# Altium PCB spectroscopy_pcb_v2.PcbDoc
Units mm, origin at the board's own origin, x right, y up, seen from the top; angles counter-clockwise.
Board outline 50 x 30 mm, 4 copper layers (Top Layer, Mid Layer 1, Mid Layer 2, Bottom Layer), stack 1.57 mm thick; 52 components, 39 nets, 192 pads, 52 vias.
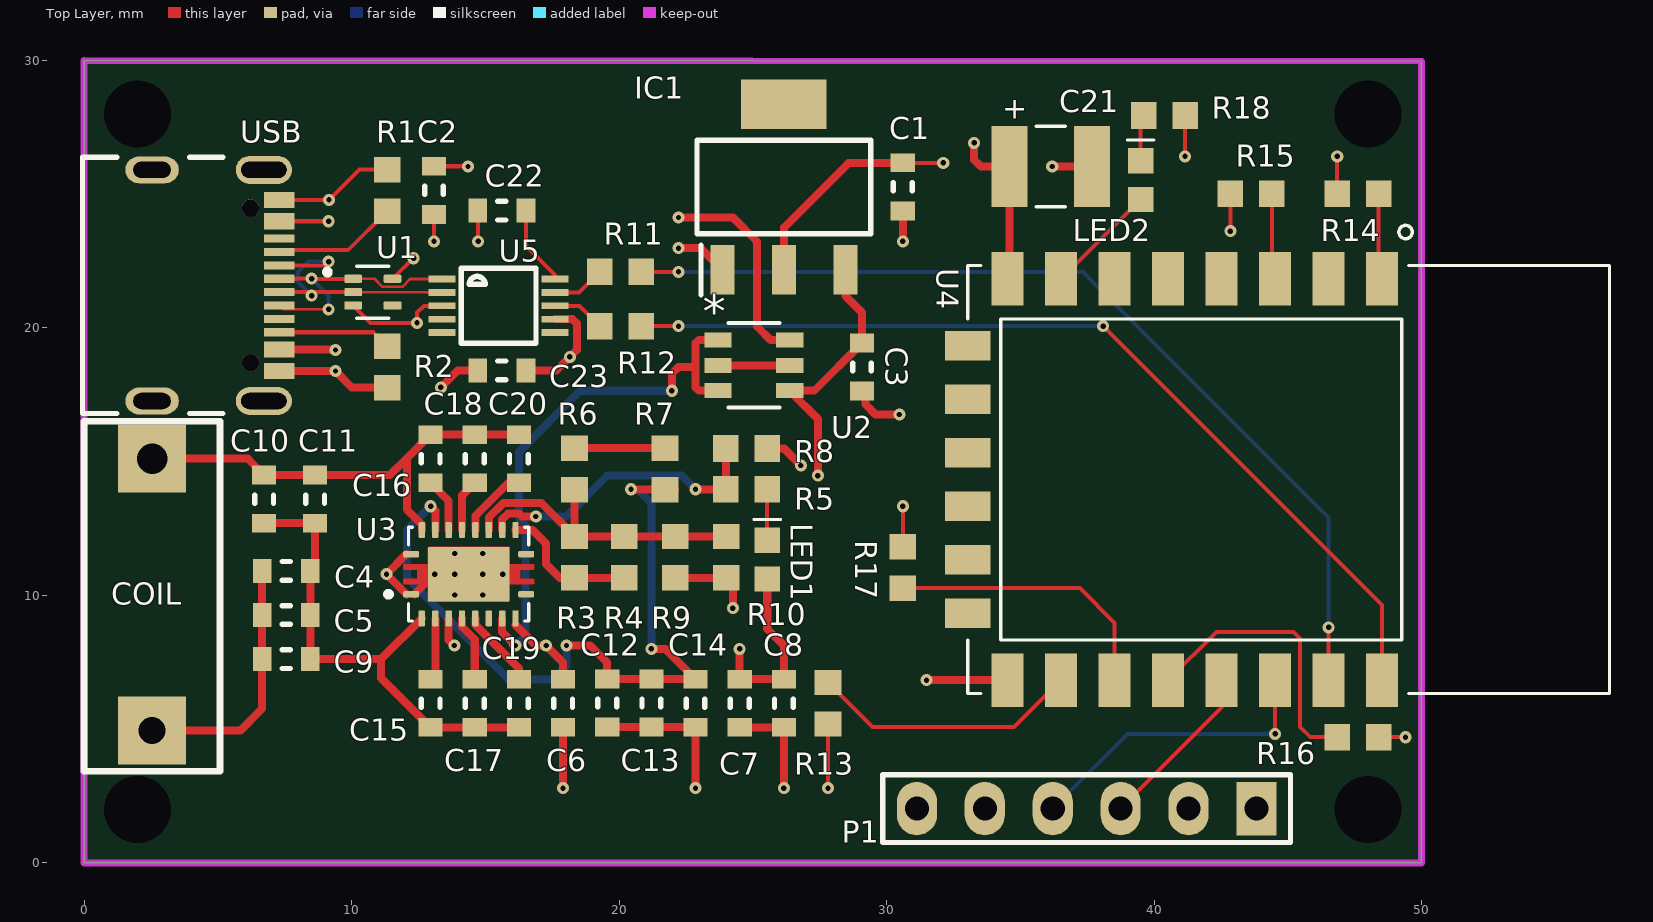
[diagram p0: Top Layer view]
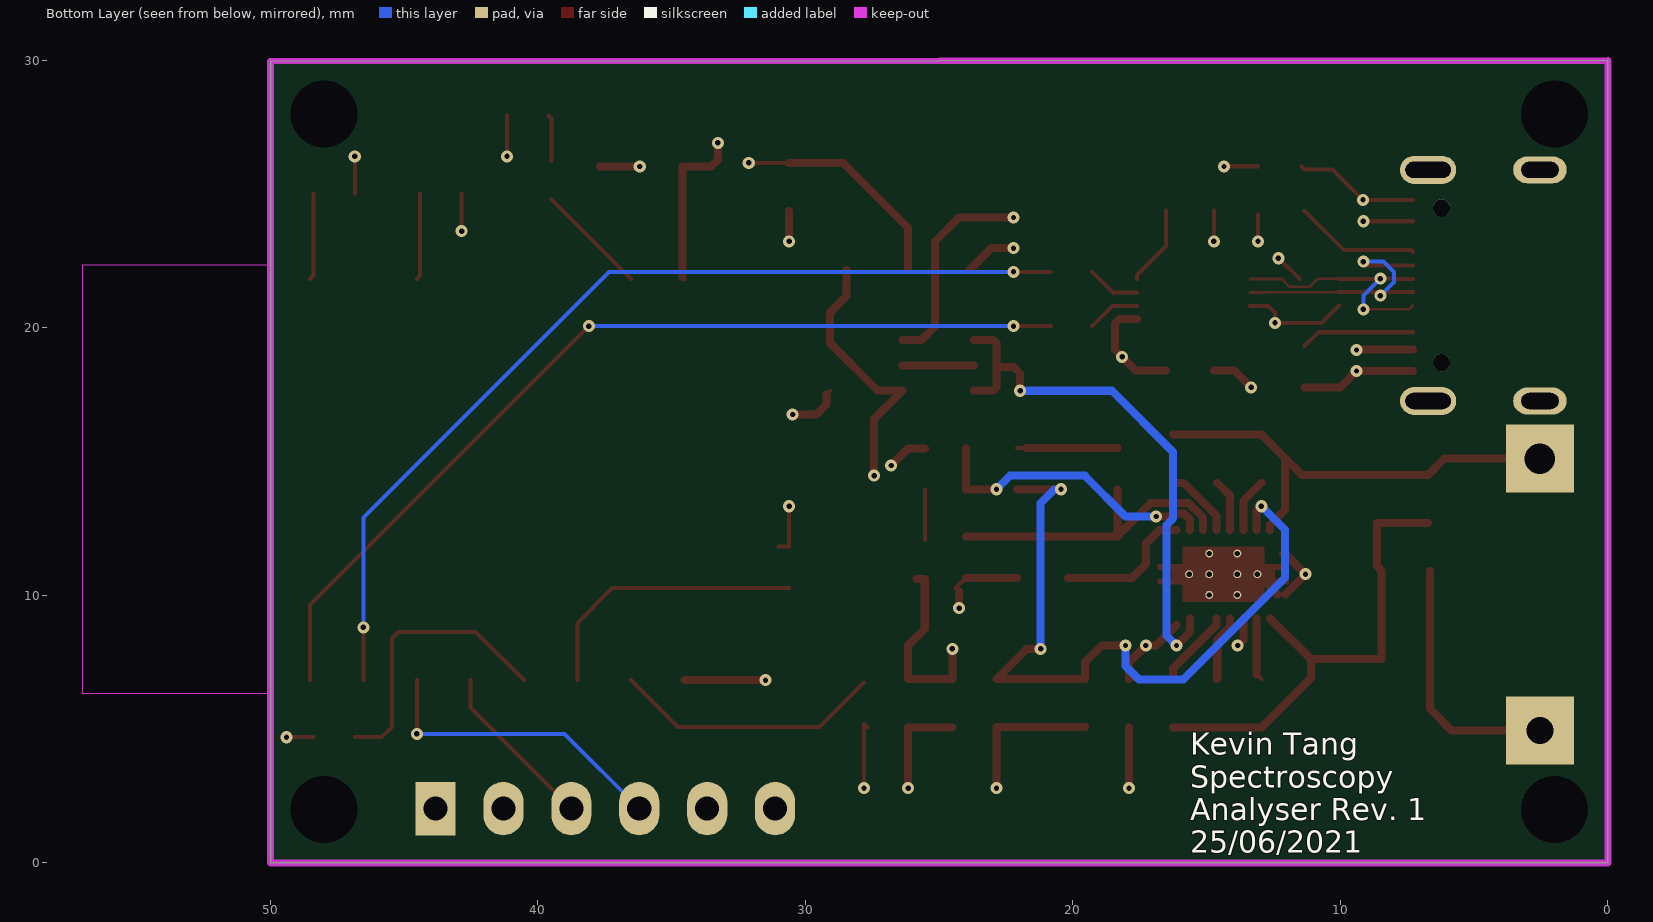
[diagram p1: Bottom Layer view, seen from below]
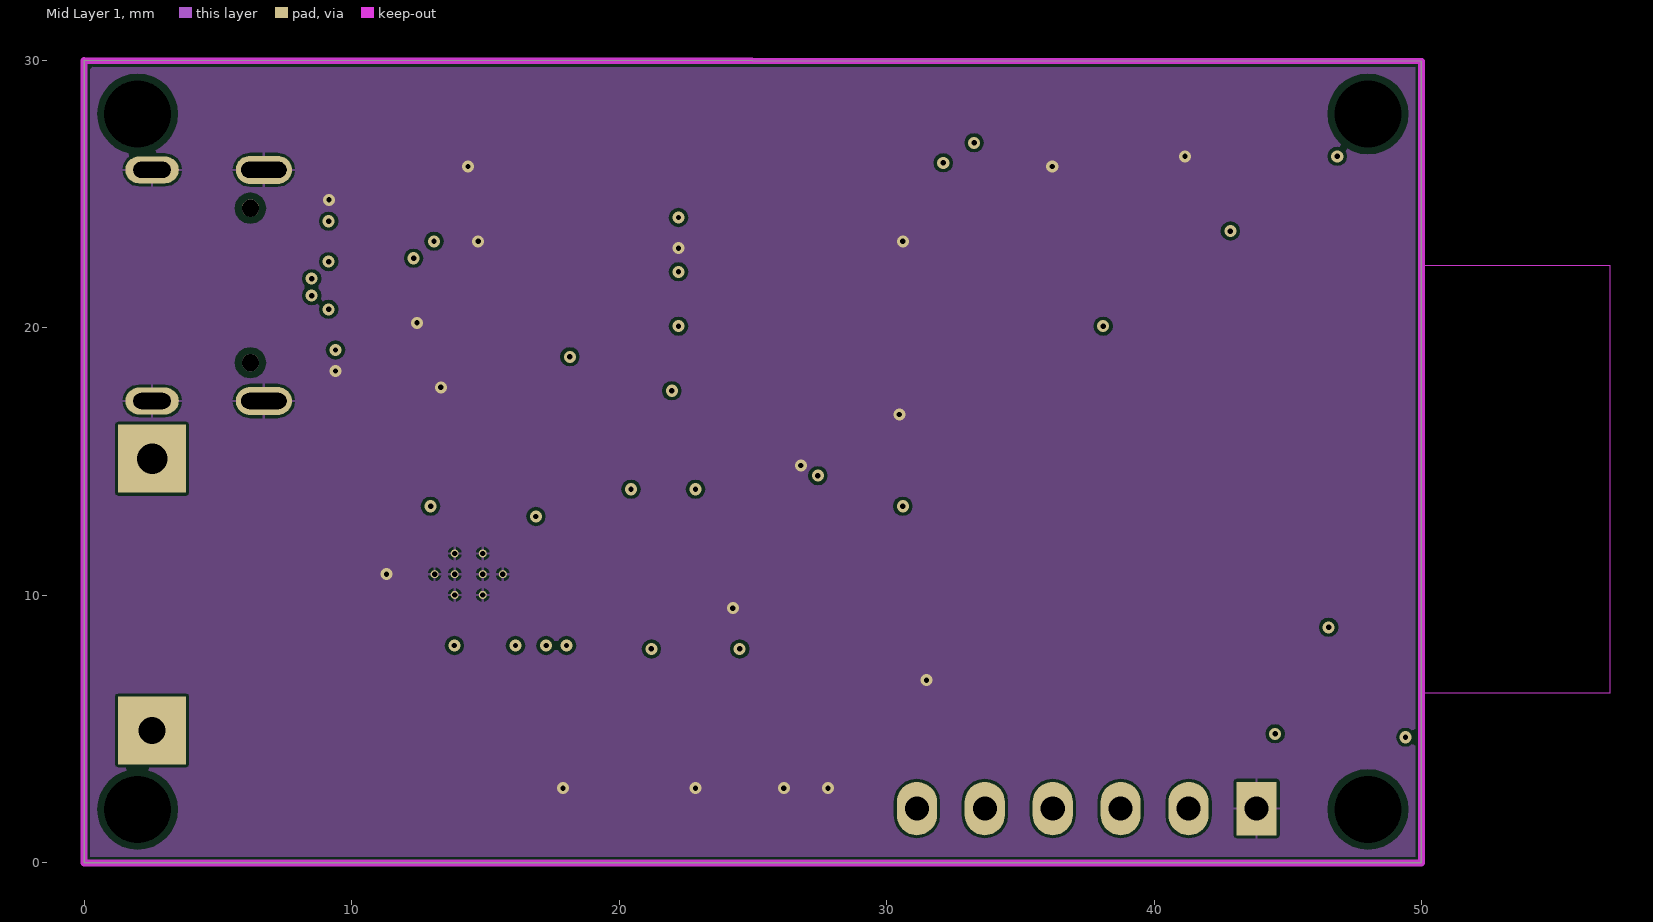
[diagram p2: Mid Layer 1]
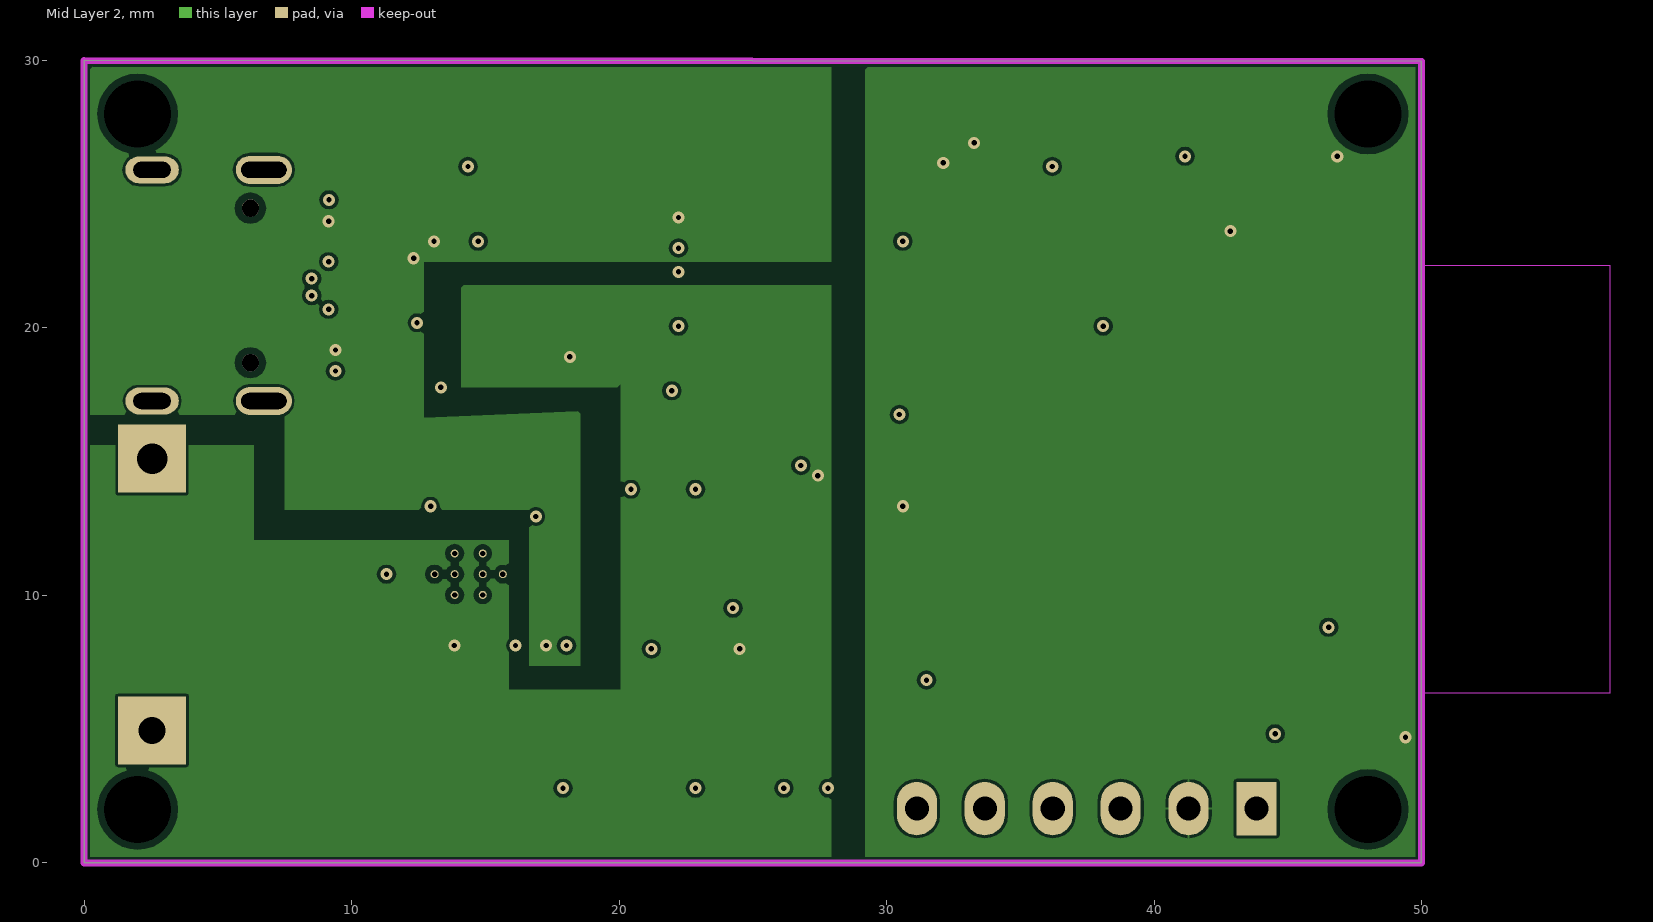
[diagram p3: Mid Layer 2]
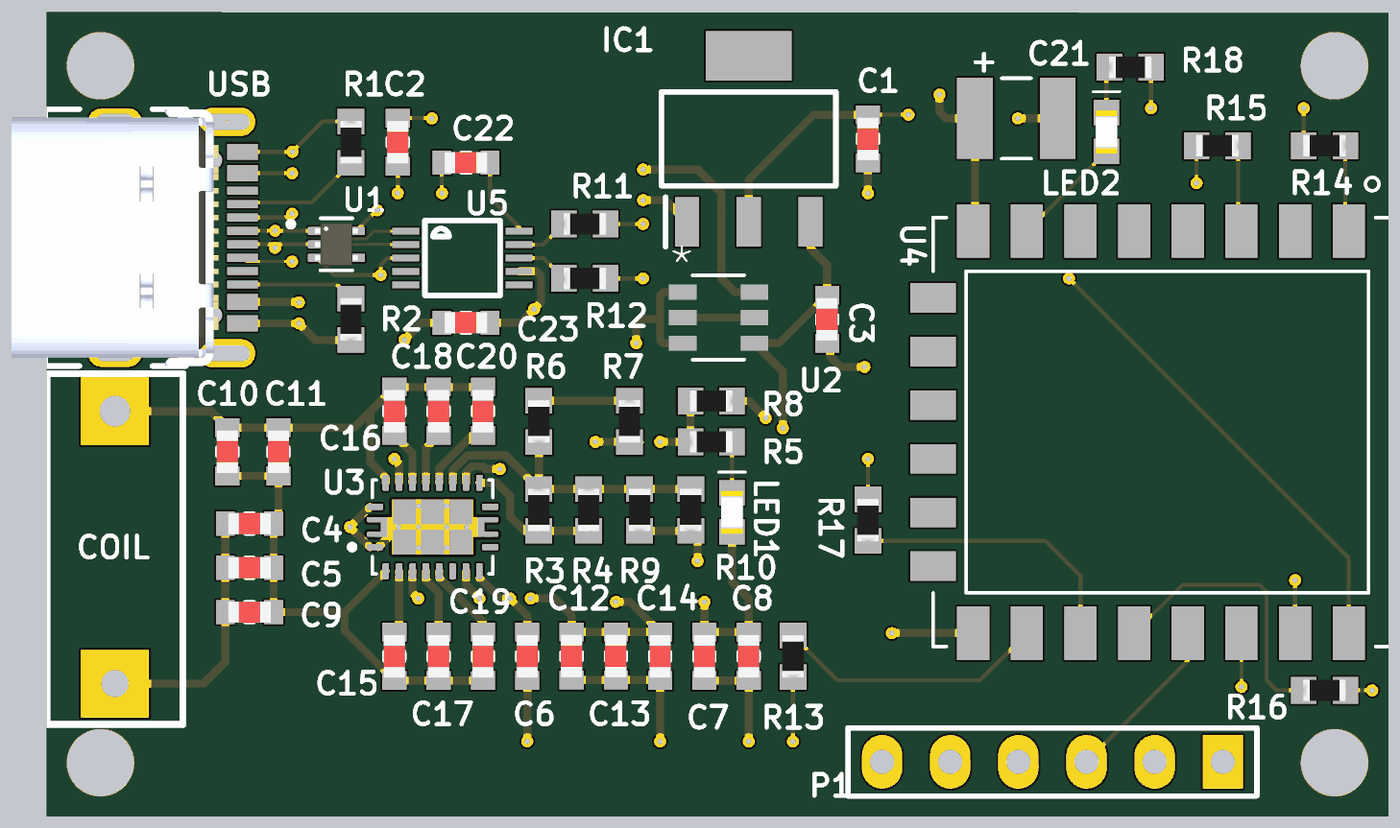
[diagram p4: 3D render of the assembled board from above, using the file's embedded part models]

## Layer stack, top to bottom
Top Solder: solder mask 0.0127, Solder Resist, Dk 3.8
Top Layer: signal copper 0.035
Dielectric 1: prepreg 0.1, 2313, Dk 4.05
Mid Layer 1: signal copper 0.0175
Core: core 1.265, FR-4, Dk 4.5
Mid Layer 2: signal copper 0.0175
Dielectric 2: prepreg 0.1, 2313, Dk 4.05
Bottom Layer: signal copper 0.035
Bottom Solder: solder mask 0.0127, Solder Resist, Dk 3.8

## Board outline
0,0 0,30 50,29.972 50,0

## Design rules (kind name [scope] priority, off if disabled: settings)
BoardOutlineClearance [All] p1: gap=0.2 ignorepadtopadclearanceinfootprint=FALSE
Clearance [All] p1: gap=0.102 ignorepadtopadclearanceinfootprint=FALSE except(0.127: Arc-Via Track-Via SMDPad-Via THPad-Via Via-Via Via-Fill Via-Poly Via-Region Via-Text; 0.25: Arc-Hole Track-Hole SMDPad-Hole THPad-Hole Via-Hole Fill-Hole Poly-Hole Region-Hole Text-Hole)
ComponentClearance [All] p1: gap=0.102 collisioncheckmode=3 verticalgap=0.102 showdistances=TRUE
DiffPairsRouting [All] p1: maxlimit=0.102 minlimit=0.102 mostfreqgap=0.102 toplayer_minwidth=0.102 toplayer_maxwidth=1816.048 toplayer_prefwidth=0.102 midlayer1_minwidth=0.102 midlayer1_maxwidth=1816.048 midlayer1_prefwidth=0.102 midlayer2_minwidth=0.102 midlayer2_maxwidth=1816.048 midlayer2_prefwidth=0.102 bottomlayer_minwidth=0.102 bottomlayer_maxwidth=1816.048 bottomlayer_prefwidth=0.102 maxuncoupledlength=12.7
Height [All] p1: minheight=0 maxheight=1816.048 prefheight=12.7
HoleSize [All] p1: absolutevalues=TRUE maxlimit=6.3 minlimit=0.2 maxpercent=80.000 minpercent=20.000
HoleToHoleClearance [All] p1: gap=0.25 allowstackedmicrovias=FALSE
MinimumAnnularRing [All] p1: minimumring=0.076
MinimumSolderMaskSliver [All] p1: minsoldermaskwidth=0
PlaneClearance [All] p1: clearance=0.102
PlaneConnect PlaneConnectPowerPads [InPadClass('PowerPads')] p1: planeconnectstyle=Direct reliefexpansion=0.508 reliefentries=4 reliefconductorwidth=0.254 reliefairgap=0.254
PlaneConnect [All] p2: pad.planeconnectstyle=Relief pad.reliefexpansion=0.3 pad.reliefentries=4 pad.reliefconductorwidth=0.102 pad.reliefairgap=0.102 via.planeconnectstyle=Direct via.reliefexpansion=0.3 via.reliefentries=4 via.reliefconductorwidth=0.127 via.reliefairgap=0.127
PolygonConnect PolygonConnectPowerPads [All vs (InPadClass('PowerPads'))] p1: connectstyle=Direct reliefconductorwidth=0.254 reliefentries=4 polygonreliefangle="90 Angle" airgapwidth=0.254
PolygonConnect [All] p2: thpad.connectstyle=Relief thpad.reliefconductorwidth=0.102 thpad.reliefentries=4 thpad.polygonreliefangle="90 Angle" thpad.airgapwidth=0.102 smdpad.connectstyle=Relief smdpad.reliefconductorwidth=0.102 smdpad.reliefentries=4 smdpad.polygonreliefangle="90 Angle" smdpad.airgapwidth=0.102 via.connectstyle=Direct via.reliefconductorwidth=0.127 via.reliefentries=4 via.polygonreliefangle="90 Angle" via.airgapwidth=0.127
RoutingVias [All] p1: holewidth=0.2 width=0.45 viastyle="Through Hole" minholewidth=0.2 minwidth=0.45 maxholewidth=6.3 maxwidth=6.55
SilkToSilkClearance [All] p1: silktosilkclearance=0
SilkToSolderMaskClearance [IsPad] p1: minsilkscreentomaskgap=0.102 clearancetoexposedcopper=TRUE
SolderMaskExpansion [All] p1: expansion=0.075
Width [All] p1: maxlimit=1816.048 minlimit=0.102 preferedwidth=0.102
20 further rules are at their usual default settings.

## Classes and differential pairs
differential pair D: +D_P -D_N

## Components (designator, comment, footprint, x,y, rotation, side; value= is the part's Value field where it differs from the comment)
C1 "22uF" CAP0603 30.607,25.273 r270 top
C2 "0.1uF" CAP0603 13.081,25.146 r90 top
C3 "10uF" CAP0603 29.083,18.542 r270 top
C4 "12 nF" CAP0603 7.556,10.922 r0 top
C5 "39 nF" CAP0603 7.556,9.271 r0 top
C6 "1uF" CAP0603 17.907,5.969 r270 top
C7 "10uF" CAP0603 24.511,5.969 r270 top
C8 "0.1uF" CAP0603 26.162,5.969 r270 top
C9 "82 nF" CAP0603 7.556,7.62 r0 top
C10 "1.8 nF" CAP0603 6.731,13.6 r90 top
C11 "100 pF" CAP0603 8.636,13.6 r90 top
C12 "10uF" CAP0603 19.558,5.98 r270 top
C13 "10uF" CAP0603 21.209,5.98 r270 top
C14 "0.1uF" CAP0603 22.86,5.969 r270 top
C15 "10nF" CAP0603 12.954,5.969 r90 top
C16 "10nF" CAP0603 12.954,15.113 r270 top
C17 "0.47uF" CAP0603 14.605,5.969 r90 top
C18 "0.47uF" CAP0603 14.605,15.113 r270 top
C19 "22nF" CAP0603 16.256,5.969 r90 top
C20 "22nF" CAP0603 16.256,15.113 r270 top
C21 "100uF TAJB107K006RNJ" CAPPC3528X210N 36.139,26.035 r0 top
C22 "10uF" CAP0603 15.621,24.384 r180 top
C23 "100nF" CAP0603 15.621,18.415 r180 top
COIL "WR483265-15F5-G" ece-INDUCTOR1005 2.54,15.113 r270 top
IC1 "AZ1117IH-3.3TRG1" SOT230P700X170-4N 26.162,25.273 r90 top
LED1 "QTLP601C4TR" LED0603P 25.54,11.34 r90 top
LED2 "QTLP601C4TR" LED0603P 39.497,25.527 r90 top
P1 "Header 6" ece-HDR1X6 43.834,2.032 r180 top
R1 "5.1k 5%" RES0603 11.335,25.146 r270 top
R2 "5.1k 5%" RES0603 11.335,18.542 r90 top
R3 "330" RES0603 18.338,11.43 r270 top
R4 "39k" RES0603 20.193,11.43 r270 top
R5 "1.5k" RES0603 24.765,13.97 r0 top
R6 "10k" RES0603 18.338,14.732 r90 top
R7 "10k" RES0603 21.717,14.732 r270 top
R8 "10k" RES0603 24.765,15.494 r180 top
R9 "220" RES0603 22.098,11.43 r90 top
R10 "1.8k" RES0603 24.003,11.43 r90 top
R11 "470" RES0603 20.053,22.098 r0 top
R12 "470" RES0603 20.053,20.066 r0 top
R13 "10k" RES0603 27.813,5.969 r90 top
R14 "10k" RES0603 47.625,25.019 r180 top
R15 "10k" RES0603 43.629,25.019 r180 top
R16 "10k" RES0603 47.625,4.699 r0 top
R17 "10k" RES0603 30.607,11.049 r90 top
R18 "470" RES0603 40.386,27.94 r0 top
U1 "TPD3E001DRLR" SOT50P160X60-5N 10.795,21.34 r0 top
U2 "Dual PMOS with Common Source for Reverse Current Blocking" TRANS_QS6_ROM 25.039,18.605 r0 top
U3 "BQ51013BRHLT" IC_MSP430FR2522IRHLR 14.379,10.794 r90 top
U4 "ESP8266-12E/ESP-12E" XCVR_ESP8266-12E/ESP-12E 41.529,14.336 r270 top
U5 "CH340E" MSOP10 15.494,20.828 r0 top
USB "USB4105-GF-A" GCT_USB4105-GF-A 2.54,21.59 r270 top

## Footprints (in the part's own frame and the unit in brackets; to place one, negate y for a bottom-side part, rotate by r counter-clockwise, add the part's x,y. Pads: shape width x height; smd on the part's side, far side on the other; paste and mask are expansions set on the pad)
CAP0603 [mm] "Chip Capacitor, 2-Leads, Body 1.6x0.8mm, IPC Medium Density"
  rect 0.7x0.9 smd: 1(-0.9,0) 2(0.9,0)
  silkscreen extent -0.15,-0.35 0.15,0.35, body extent -0.8,-0.4 0.8,0.4, height 0.3
CAPPC3528X210N [mm]
  rect 1.34x3.02 smd: 1(-1.54,0) 2(1.54,0)
  silkscreen extent -0.55,-1.5 0.55,1.5
ece-HDR1X6 [mm] "Header 6 way"
  rect 1.5x2 hole 0.9: 1(0,0)
  oval 1.5x2 hole 0.9: 2(2.54,0) 3(5.08,0) 4(7.62,0) 5(10.16,0) 6(12.7,0)
  silkscreen extent -1.27,-1.27 13.97,1.27
ece-INDUCTOR1005 [mil]
  rect 100x100 hole 45: 1(0,0)
  rect 100x100 hole 40: 2(400,0)
  silkscreen extent -55,-100 460,100
GCT_USB4105-GF-A [mm]
  rect 0.6x1.15 smd: A1_B12(-3.2,4.755) A4_B9(-2.4,4.755) B1_A12(3.2,4.755) B4_A9(2.4,4.755)
  rect 0.3x1.15 smd: A5(-1.25,4.755) A6(-0.25,4.755) A7(0.25,4.755) A8(1.25,4.755) B5(1.75,4.755) B6(0.75,4.755) B7(-0.75,4.755) B8(-1.75,4.755)
  oval 1.05x2.1 hole 0.6 slot 1.7 at 90 deg: S1(-4.32,4.18) S4(4.32,4.18)
  oval 1x2 hole 0.6 slot 1.4 at 90 deg: S2(-4.32,0) S3(4.32,0)
  round 0.65 hole 0.65 unplated: ""(-2.89,3.68) ""(2.89,3.68)
  silkscreen extent -4.79,-2.6 4.79,2.65, body extent -4.79,-3.86 4.79,3.86, height 3.31
IC_MSP430FR2522IRHLR [mm]
  rrect42% 0.24x0.6 smd: 1(-0.75,2.15) 10(-0.75,-2.15) 11(0.75,-2.15) 20(0.75,2.15)
  rrect42% 0.6x0.24 smd: 2(-1.65,1.75) 3(-1.65,1.25) 4(-1.65,0.75) 5(-1.65,0.25) 6(-1.65,-0.25) 7(-1.65,-0.75) 8(-1.65,-1.25) 9(-1.65,-1.75) 12(1.65,-1.75) 13(1.65,-1.25) 14(1.65,-0.75) 15(1.65,-0.25) 16(1.65,0.25) 17(1.65,0.75) 18(1.65,1.25) 19(1.65,1.75)
  rrect5% 2.05x3.05 smd paste-3: 21(0,0)
  round 0.3 hole 0.2: 22(0,1.275) 23(-0.775,0.525) 24(0,0.525) 25(0.775,0.525) 26(-0.775,-0.525) 27(0,-0.525) 28(0.775,-0.525) 29(0,-1.275)
  Top Layer region: 381 vertices and 0 holes, not listed, extent -1.025,-2.45 1.025,2.45
  silkscreen extent -1.75,-2.25 1.75,3.1
LED0603P [mm]
  rect 0.95x0.95 smd: 1(-0.725,0) 2(0.725,0)
  silkscreen extent 1.5,-0.5 1.5,0.5, body extent -0.8,-0.4 0.81,0.4, height 0.72
MSOP10 [mm]
  rect 1x0.25 smd: 1(-2.113,1) 2(-2.113,0.5) 3(-2.113,0) 4(-2.113,-0.5) 5(-2.113,-1) 6(2.113,-1) 7(2.113,-0.5) 8(2.113,0) 9(2.113,0.5) 10(2.113,1)
  silkscreen extent -1.4,-1.4 1.4,1.4
RES0603 [mm] "Chip Resistor, 2-Leads, Body 1.6x0.8mm, IPC Medium Density"
  rect 0.95x1 smd: 1(-0.775,0) 2(0.775,0)
  body extent -0.8,-0.4 0.8,0.4, height 0.45
SOT50P160X60-5N [mm]
  rrect25% 0.66x0.3 smd: 1(-0.735,0.5) 2(-0.735,0) 3(-0.735,-0.5) 4(0.735,-0.5) 5(0.735,0.5)
  silkscreen extent -1.8,-0.97 0.6,0.97, body extent -0.8,-0.8 0.8,0.8, height 0.6
SOT230P700X170-4N [mm]
  rect 1.85x0.9 smd: 1(-3.1,2.3) 2(-3.1,0) 3(-3.1,-2.3)
  rect 1.85x3.2 smd: 4(3.1,0)
  silkscreen extent -4.03,-3.25 1.75,3.25
TRANS_QS6_ROM [mm]
  rect 1.023x0.558 smd paste+0 mask+0: 1(-1.337,0.95) 2(-1.337,0) 3(-1.337,-0.95) 4(1.337,-0.95) 5(1.337,0) 6(1.337,0.95)
  silkscreen extent -0.95,-1.57 0.95,1.57, body extent 0,0 0.25,0.25, height 0.25
XCVR_ESP8266-12E/ESP-12E [mm]
  rect 2x1.2 smd: 1(-7.5,7) 2(-7.5,5) 3(-7.5,3) 4(-7.5,1) 5(-7.5,-1) 6(-7.5,-3) 7(-7.5,-5) 8(-7.5,-7) 15(7.5,-7) 16(7.5,-5) 17(7.5,-3) 18(7.5,-1) 19(7.5,1) 20(7.5,3) 21(7.5,5) 22(7.5,7)
  rect 1.1x1.7 smd: 9(-5,-8.5) 10(-3,-8.5) 11(-1,-8.5) 12(1,-8.5) 13(3,-8.5) 14(5,-8.5)
  Keep-Out Layer region: 8,8.51 -8.009,8.51 -8.009,15.5 8,15.5
  Keep-Out Layer region: 8,8.51 -8.009,8.51 -8.009,15.5 8,15.5
  silkscreen extent -9.5,-8.5 8,15.5

## Part data
C1 C2 C3 C4 C5 C6 C7 C8 C9 C10 C11 C12 C13 C14 C15 C16 C17 C18 C19 C20 C22 C23: library part "CAP SM0603", "SM capacitor"
C21: library part TAJB107K006RNJ, "100µF Molded Tantalum Capacitors 6.3V 1411 _3528 Metric_, 1210 1.7Ohm", Package="1210 AVX", Availability=Unavailable, MF=AVX, MP=TAJB107K006RNJ, Price=None, SnapEDA_Link=https://www.snapeda.com/parts/TAJB107K006RNJ/AVX/view-part/381691/?ref=snap
COIL: library part Inductor, "inductor Surface Mount"
IC1: "Linear Voltage Regulator IC Positive Fixed 1 Output 1A SOT-223", Package="SOT-223 Diodes Inc.", Availability=Warning, Check_prices=https://www.snapeda.com/parts/AZ1117IH-3.3TRG1/Diodes%20Inc./view-part/490259/?ref=eda, MF="Diodes Inc.", MP=AZ1117IH-3.3TRG1, Price=None, Purchase-URL=https://pricing.snapeda.com/search/part/AZ1117IH-3.3TRG1/?ref=eda, SnapEDA_Link=https://www.snapeda.com/parts/AZ1117IH-3.3TRG1/Diodes%20Inc./view-part/490259/?ref=snap
LED1 LED2: library part LNJ337W83RA, "LED SM 0603 GREEN 1V95 FWD VOLTAGE", Forward Voltage=1V95, Supplier Part Number 1=LNJ337W83RACT-ND, Supplier 1=Digi-Key
P1: "Header, 6-Pin", LatestRevisionDate=17-Jul-2002, LatestRevisionNote="Re-released for DXP Platform.", Publisher="Altium Limited"
R1 R2 R3 R4 R5 R6 R7 R8 R9 R10 R11 R12 R13 R14 R15 R16 R17 R18: library part "Res SM 0603", "Resistor"
U1: "Low-capacitance 3-channel +/-15K-V ESD-protection array for high-speed data interfaces 5-SOT-5X3 -40 to 85", Package="SOT-5X3-5 Texas Instruments", Check_prices=https://www.snapeda.com/parts/TPD3E001DRLR/Texas%20Instruments/view-part/382422/?ref=eda, Digi-Key_Part_Number=296-21885-1-ND, MF="Texas Instruments", MP=TPD3E001DRLR, Purchase-URL=https://pricing.snapeda.com/search/part/TPD3E001DRLR/?ref=eda, SnapEDA_Link=https://www.snapeda.com/parts/TPD3E001DRLR/Texas%20Instruments/view-part/382422/?ref=snap
U2: library part QS6J1TR, "No Description Available", Built_By=EMA_Matt, Copyright="Copyright (C) 2018 Accelerated Designs. All rights reserved", Manufacturer_Part_Number=QS6J1TR, RefDes=RefDes, SourceLibrary=Rohm_2019-09-23, Type=DEV, Vendor="ROHM Semiconductor"
U3: "WPC 1.1 Compatible Fully integrated Wireless power Receiver IC 20-VQFN 0 to 125", Package="VQFN-20 Texas Instruments", Digi-Key_Part_Number=296-35638-1-ND, DigiKey-Purchase-URL=https://snapeda.com/shop?store=DigiKey&id=46178, MF="Texas Instruments", Mouser-Purchase-URL=https://snapeda.com/shop?store=Mouser&id=46178, MP=BQ51013BRHLT, SnapEDA_Link=https://www.snapeda.com/parts/BQ51013BRHLT/Texas%20Instruments/view-part/46178/?ref=snap, Texas_Instruments-Purchase-URL=https://snapeda.com/shop?store=Texas+Instruments&id=46178
U4: "This WiFi module has a 32-bit MCU micro and clock speeds supporting 80 MHz or 160 MHz. Supports the RTOS and integrated Wi-Fi MAC/BB/RF/PA/LNA, and has an on-board antenna.", Package=None, Availability=Unavailable, MF=AI-Thinker, MP=ESP8266-12E/ESP-12E, Price=None, SnapEDA_Link=https://www.snapeda.com/parts/ESP8266-12E/ESP-12E/AI-Thinker/view-part/106414/?ref=snap
U5: "USB to serial chip CH340", Package="Package Analog Devices", Availability=Unavailable, MF=WCH, MP=CH340E, Price=None, SnapEDA_Link=https://www.snapeda.com/parts/CH340E/WCH/view-part/3625184/?ref=snap
USB: "USB-C (USB TYPE-C) USB 2.0 Receptacle Connector 24 (16+8 Dummy) Position Surface Mount, Right Angle; Through Hole", Package=None, Availability=Warning, Check_prices=https://www.snapeda.com/parts/USB4105-GF-A/Global%20Connector%20Technology/view-part/4423780/?ref=eda, MF=GCT, MP=USB4105-GF-A, Price=None, Purchase-URL=https://pricing.snapeda.com/search/part/USB4105-GF-A/?ref=eda, SnapEDA_Link=https://www.snapeda.com/parts/USB4105-GF-A/Global%20Connector%20Technology/view-part/4423780/?ref=snap

## Free pads (board coordinates)
  round 1.524 hole 2.5: M3(2,2) M3(2,28) M3(48,2) M3(48,28)

## Via types
v1: diameter 0.45, hole 0.2, Top Layer to Bottom Layer, 52 vias

## Nets (pads, with @x,y where several pads share a name; then routed paths per layer and width w, separated by ;. In a path a pad name is that pad's centre, name@x,y a point inside that pad or via, vN(x,y) a via of type N, cw(c..) or ccw(c..) an arc to the next point about the centre after c; other vN are vias at no path point)
3.3V: C1.1 C21.1 IC1.2 P1.2 R14.2 R15.2 R16.2 R17.2 U4.8 | length 20.5
  Top Layer w0.15: v1(30.607,13.336) R17.2 R17.2@31.001,11.824 ; C1.1 v1(32.12,26.173) ; U4.8 U4.8@34.599,21.906 ; v1(42.854,23.622) R15.2 ; R14.2 v1(46.85,26.416) ; R16.2 v1(49.403,4.699)
  Top Layer w0.3: IC1.2 26.162,23.749 28.586,26.173 C1.1 ; v1(33.274,26.924) 33.274,26.289 33.528,26.035 C21.1 U4.8@34.599,21.906
5V_USB: C2.1 C6.1 U1.5 U2.6 U3.9 USB.A4_B9 USB.B4_A9 | length 17.1
  Top Layer w0.15: USB.A4_B9 9.131,23.99 v1@9.144,24.003 ; v1@9.385,19.19 v1(9.398,19.177) ; U1.5 12.296,22.606 v1(12.319,22.606) ; v1@13.081,23.391 C2.1 ; C6.1@17.642,6.869 C6.1
  Top Layer w0.3: USB.B4_A9 v1@9.385,19.19 ; U3.9@16.129,8.89 16.891,8.128 v1(17.272,8.128) 17.907,7.493 C6.1 ; v1(22.225,24.13) 24.257,24.13 25.146,23.241 ; 25.149,23.241 25.149,20.063 25.657,19.555 U2.6
  other v1: 13.081,23.241 9.144,23.99
AC1: C4.2 C5.2 C9.2 C10.1 C11.1 C15.1 C17.1 C19.1 U3.2 | length 18.5
  Top Layer w0.3: C10.1 C11.1 8.636,11.102 C4.2 C5.2 C9.2 11.105,7.62 ; U3.2 11.105,7.62 ; C19.1 C17.1 C15.1 11.105,6.918 11.105,7.62
AC2: C10.2 C11.2 C16.1 C18.1 C20.1 COIL.1 U3.19 | length 17.5
  Top Layer w0.3: COIL.1 6.118,15.113 C10.2 C11.2 11.441,14.5 12.065,15.124 ; U3.19 12.629,12.644 12.065,13.208 12.065,15.124 ; C20.1 C18.1 C16.1 12.065,15.124
AD-EN: U2.1 U2.3 U3.8 | length 20.5
  Top Layer w0.3: U3.8 15.629,8.628 v1(16.129,8.128) ; v1(21.971,17.653) 21.971,18.288 22.225,18.542 22.86,18.542 ; U2.3 22.985,17.655 22.86,17.78 22.86,18.542 ; U2.1 22.984,19.555 22.86,19.431 22.86,18.542
  Bottom Layer w0.3: v1(16.129,8.128) 16.51,8.509 16.51,12.625 16.256,12.879 16.256,15.367 18.542,17.653 v1(21.971,17.653)
BOOT1: C15.2 U3.3 | length 2.3
  Top Layer w0.15: C15.2 C15.2@13.129,7.044
  Top Layer w0.3: C15.2@13.129,7.044 U3.3
BOOT2: C16.2 U3.17 | length 2
  Top Layer w0.3: C16.2 13.629,13.538 U3.17
CC1: R1.2 USB.A5 | length 4.7
  Top Layer w0.15: USB.A5 7.361,22.906 9.87,22.906 R1.2
CC2: R2.2 USB.B5 | length 4.3
  Top Layer w0.15: USB.B5 10.812,19.84 R2.2
CLAMP1: C17.2 U3.5 | length 2.5
  Top Layer w0.3: U3.5 14.129,8.83 14.605,8.354 C17.2
CLAMP2: C18.2 U3.16 | length 2
  Top Layer w0.3: U3.16 14.129,13.737 C18.2
COMM1: C19.2 U3.6 | length 2.9
  Top Layer w0.3: U3.6 14.629,8.898 16.256,7.271 C19.2
COMM2: C20.2 U3.15 | length 2.7
  Top Layer w0.3: U3.15 14.629,12.978 15.864,14.213 C20.2
D_N: U1.2 U5.2 USB.A7 USB.B7 | length 10.5
  Top Layer w0.102: U1.2 11.069,21.34 11.075,21.334 11.985,21.334 11.991,21.34 12.818,21.34 12.83,21.328 U5.2
  Top Layer w0.15: USB.A7 8.378,21.34 v1(8.509,21.209) 8.64,21.34 U1.2 ; USB.B7 9.005,22.34 v1(9.144,22.479)
  Bottom Layer w0.15: v1(8.509,21.209) 8.001,21.717 8.001,22.098 8.382,22.479 v1(9.144,22.479)
D_P: U1.1 U5.1 USB.A6 USB.B6 | length 9.7
  Top Layer w0.102: USB.B6 7.438,20.697 v1(9.144,20.697) ; U1.1 10.856,21.84 11.159,21.538 11.901,21.538 12.192,21.828 U5.1
  Top Layer w0.15: USB.A6 7.921,21.84 7.925,21.844 v1(8.509,21.844) 8.513,21.84 U1.1
  Bottom Layer w0.15: v1(8.509,21.844) 9.144,21.209 v1(9.144,20.697)
EN: R15.1 U4.3 | length 3.2
  Top Layer w0.15: R15.1 44.404,21.961 U4.3
FOD: R3.1 R4.1 R6.1 R9.2 R10.2 U3.14 | length 11.8
  Top Layer w0.3: U3.14 15.129,12.91 15.681,13.462 17.093,13.462 R3.1@18.338,12.217 ; R6.1 R3.1@18.338,12.217 ; R10.2 R9.2 R4.1 R3.1 R3.1@18.338,12.217
GND: C1.2 C2.2 C3.2 C6.2 C7.2 C8.2 C12.2 C13.2 C14.2 C21.2 C22.2 C23.2 IC1.1 P1.1 R1.1 R2.1 R8.1 R9.1 R10.1 R13.1 R18.2 U1.3 U3.1 U3.20 U3.21 U3.22 U3.23 U3.24 U3.25 U3.26 U3.27 U3.28 U3.29 U4.15 U5.3 USB.A1_B12 USB.B1_A12 USB.S1 USB.S2 USB.S3 USB.S4 | length 50.9
  Top Layer w0.15: USB.A1_B12 v1(9.157,24.79) 10.288,25.921 R1.1 R1.1@11.46,26.046 ; U1.3 10.707,20.193 v1(12.446,20.193) 12.446,20.574 12.7,20.828 U5.3 ; U3.20@12.052,11.544 U3.20 ; U3.1@12.054,10.044 U3.1 U3.1@12.354,10.044 ; C2.2 14.34,26.046 v1(14.351,26.035) ; C22.2 14.721,23.252 v1(14.732,23.241) ; C12.2@19.547,5.069 C12.2 ; C14.2@22.849,5.08 C14.2 ; R10.1 R10.1@24.384,10.274 ; R13.1@27.688,5.069 R13.1 v1(27.813,2.794) ; C3.2 C3.2@29.21,17.515 ; v1(41.161,26.416) R18.2
  Top Layer w0.3: USB.B1_A12 v1(9.398,18.39) 10.021,17.767 R2.1 ; U3.20@12.052,11.544 v1(11.303,10.795) U3.1@12.054,10.044 ; U3.1@12.354,10.044 U3.22 ; v1(13.335,17.78) 13.97,18.415 C23.2 ; v1(17.907,2.794) C6.2 ; C12.2 C13.2 C14.2@22.849,5.08 ; R9.1 R10.1 ; v1(22.225,22.987) 23.048,22.987 IC1.1 ; v1(22.86,2.794) C14.2 ; v1(24.257,9.525) 24.257,10.147 ; C7.2 C8.2 v1(26.162,2.794) ; R8.1 26.162,15.494 v1(26.797,14.859) ; C3.2@29.21,17.515 29.21,17.145 29.591,16.764 v1(30.48,16.764) ; v1(30.607,23.241) C1.2 ; v1(31.496,6.836) U4.15 ; v1(36.195,26.035) C21.2
GPIO0: R16.1 U4.18 | length 10.6
  Top Layer w0.15: U4.18 42.329,8.636 45.212,8.636 45.466,8.382 45.466,5.08 45.847,4.699 R16.1
GPIO2: R17.1 U4.17 | length 10.6
  Top Layer w0.15: R17.1 37.224,10.274 38.529,8.969 U4.17
ILIM: R3.2 R4.2 U3.12 | length 5.3
  Top Layer w0.3: U3.12 16.131,12.446 16.764,12.446 17.272,11.938 17.272,11.176 17.793,10.655 R3.2 R4.2
NetC4_1: C4.1 C5.1 C9.1 COIL.2 | length 9.6
  Top Layer w0.3: COIL.2 5.842,4.953 6.656,5.767 C9.1 C5.1 C4.1
NetC22_1: C22.1 U5.10 | length 3
  Top Layer w0.15: C22.1 16.521,23.065 17.607,21.979 U5.10
NetLED1_2: LED1.2 R5.2 | length 1.9
  Top Layer w0.15: LED1.2 R5.2
NetLED2_2: LED2.2 R18.1 | length 1.7
  Top Layer w0.15: LED2.2 39.497,27.826 R18.1
NetR6_2: R6.2 R7.1 | length 3.8
  Top Layer w0.15: R7.1 R7.1@22.098,15.507
  Top Layer w0.3: R6.2 R7.1
NetR11_1: R11.1 U5.9 | length 2
  Top Layer w0.15: U5.9 18.508,21.328 R11.1
NetR12_1: R12.1 U5.8 | length 2
  Top Layer w0.15: U5.8 18.516,20.828 R12.1
NetR13_2: R13.2 U4.16 | length 10.1
  Top Layer w0.15: R13.2 29.477,5.08 34.773,5.08 U4.16
OUT: C3.1 C7.1 C8.1 C23.1 IC1.3 LED1.1 U2.4 U3.4 U5.7 | length 22.2
  Top Layer w0.3: U3.4 13.629,8.342 v1(13.843,8.128) ; C23.1 17.653,18.415 v1(18.161,18.923) 18.423,19.185 18.423,20.169 18.264,20.328 U5.7 ; v1(24.511,8.001) C7.1 C8.1 26.162,8.128 25.54,8.75 LED1.1 LED1.1@25.855,10.615 ; v1@27.432,14.605 27.432,16.598 U2.4 27.296,17.655 C3.1 29.083,20.574 28.462,21.195 IC1.3
  other v1: 27.432,14.478
RECT: C12.1 C13.1 C14.1 R7.2 U3.18 | length 28.4
  Top Layer w0.3: v1(12.954,13.335) 13.129,13.16 U3.18 ; v1(18.034,8.128) 18.923,8.128 19.558,7.493 C12.1 C13.1 C14.1@22.849,6.88 ; v1(20.447,13.97) 22.085,13.97 R7.2@22.098,13.957 ; v1(21.209,8.001) 21.728,8.001 C14.1@22.849,6.88 ; C14.1 C14.1@22.849,6.88
  Bottom Layer w0.3: v1(12.954,13.335) 12.065,12.446 12.065,10.668 15.875,6.858 17.526,6.858 18.034,7.366 v1(18.034,8.128) ; v1(20.447,13.97) 20.688,13.97 21.209,13.449 v1(21.209,8.001)
RESET: R14.1 U4.1 | length 3.2
  Top Layer w0.15: R14.1 48.4,21.965 U4.1
RX: R11.2 U4.21 | length 35.6
  Top Layer w0.15: R11.2 v1(22.225,22.098) ; U4.21 v1(46.529,8.81)
  Bottom Layer w0.15: v1(22.225,22.098) 37.338,22.098 46.529,12.907 v1(46.529,8.81)
SCL: P1.4 U4.20 | length 11.5
  Top Layer w0.15: v1(44.529,4.826) U4.20
  Bottom Layer w0.15: P1.4 39.008,4.826 v1(44.529,4.826)
SDA: P1.3 U4.19 | length 6.4
  Top Layer w0.15: P1.3 42.529,5.807 U4.19
SOURCE: U2.2 U2.5 | length 2.7
  Top Layer w0.3: U2.2 U2.5
TS: R5.1 R8.2 U3.13 | length 11.3
  Top Layer w0.3: U3.13 15.629,12.835 15.854,13.06 16.259,13.06 16.365,12.954 v1(16.891,12.954) ; v1(22.86,13.97) R5.1 R8.2
  Bottom Layer w0.3: v1(16.891,12.954) 18.034,12.954 19.558,14.478 22.352,14.478 v1(22.86,13.97)
TX: R12.2 U4.22 | length 34.8
  Top Layer w0.15: R12.2 v1(22.225,20.066) ; v1(38.1,20.066) 48.529,9.637 U4.22
  Bottom Layer w0.15: v1(22.225,20.066) v1(38.1,20.066)
WIFI_LED: LED2.1 U4.7 | length 4.2
  Top Layer w0.15: U4.7 39.495,24.802 LED2.1
pads on no net: IC1.4 P1.5 P1.6 U1.4 U3.7 U3.10 U3.11 U4.2 U4.4 U4.5 U4.6 U4.9 U4.10 U4.11 U4.12 U4.13 U4.14 U5.4 U5.5 U5.6 USB. USB.A8 USB.B8

## Polygon pours and split planes (outlines as drawn)
GND on Mid Layer 1 "GND Plane" (solid, pour order 0): 0,30 0.028,29.972 50,29.972 50,0 0,0
3.3V on Mid Layer 2 "3.3V Plane" (solid, pour order 6): 29.21,29.845 49.873,29.845 50,29.972 50,0 29.337,0 29.21,0.127
OUT on Mid Layer 2 "5V_COIL Plane" (solid, pour order 4): 0,15.621 6.35,15.621 6.35,12.446 6.35,12.065 15.875,12.065 15.875,6.477 20.066,6.477 20.066,17.907 19.939,17.78 14.097,17.78 14.097,21.463 14.097,21.59 27.94,21.59 27.94,0 0,0
5V_USB on Mid Layer 2 "5V_USB Plane" (solid, pour order 2): 0,30 0.016,29.984 27.94,29.984 27.94,22.479 20.066,22.479 18.542,22.479 12.7,22.479 12.7,16.637 18.542,16.891 18.542,9.525 18.542,7.366 16.637,7.366 16.637,13.208 7.493,13.208 7.493,16.764 -0.129,16.764

## Keep-outs
Keep-Out Layer:
  the board outline again, w0.254

## Silkscreen, mask and mechanical layers (free items; w line width, h text height)
Top Overlay:
  text "+" at 34.328,27.813 h0.81
Bottom Overlay:
  text "Kevin Tang / Spectroscopy  / Analyser Rev. 1 / 25/06/2021" at 15.621,0.381 h0.81

## Text inside footprints (layer, text, board x,y; h text height)
U2: Top Overlay "*" at 23.13,19.986 h1.27; Mechanical 13 "*" at 24.277,18.706 h1.27
USB: Mechanical 13 "PCB EDGE" at 0.04,16.19 h0.41 r270